# Altium PCB PCB1.PcbDoc
Units mil, origin at the board's own origin, x right, y up, seen from the top; angles counter-clockwise.
Board outline 1444.03 x 1769.03 mil, 2 copper layers (Top Layer, Bottom Layer); 51 components, 74 nets, 285 pads, 210 vias.
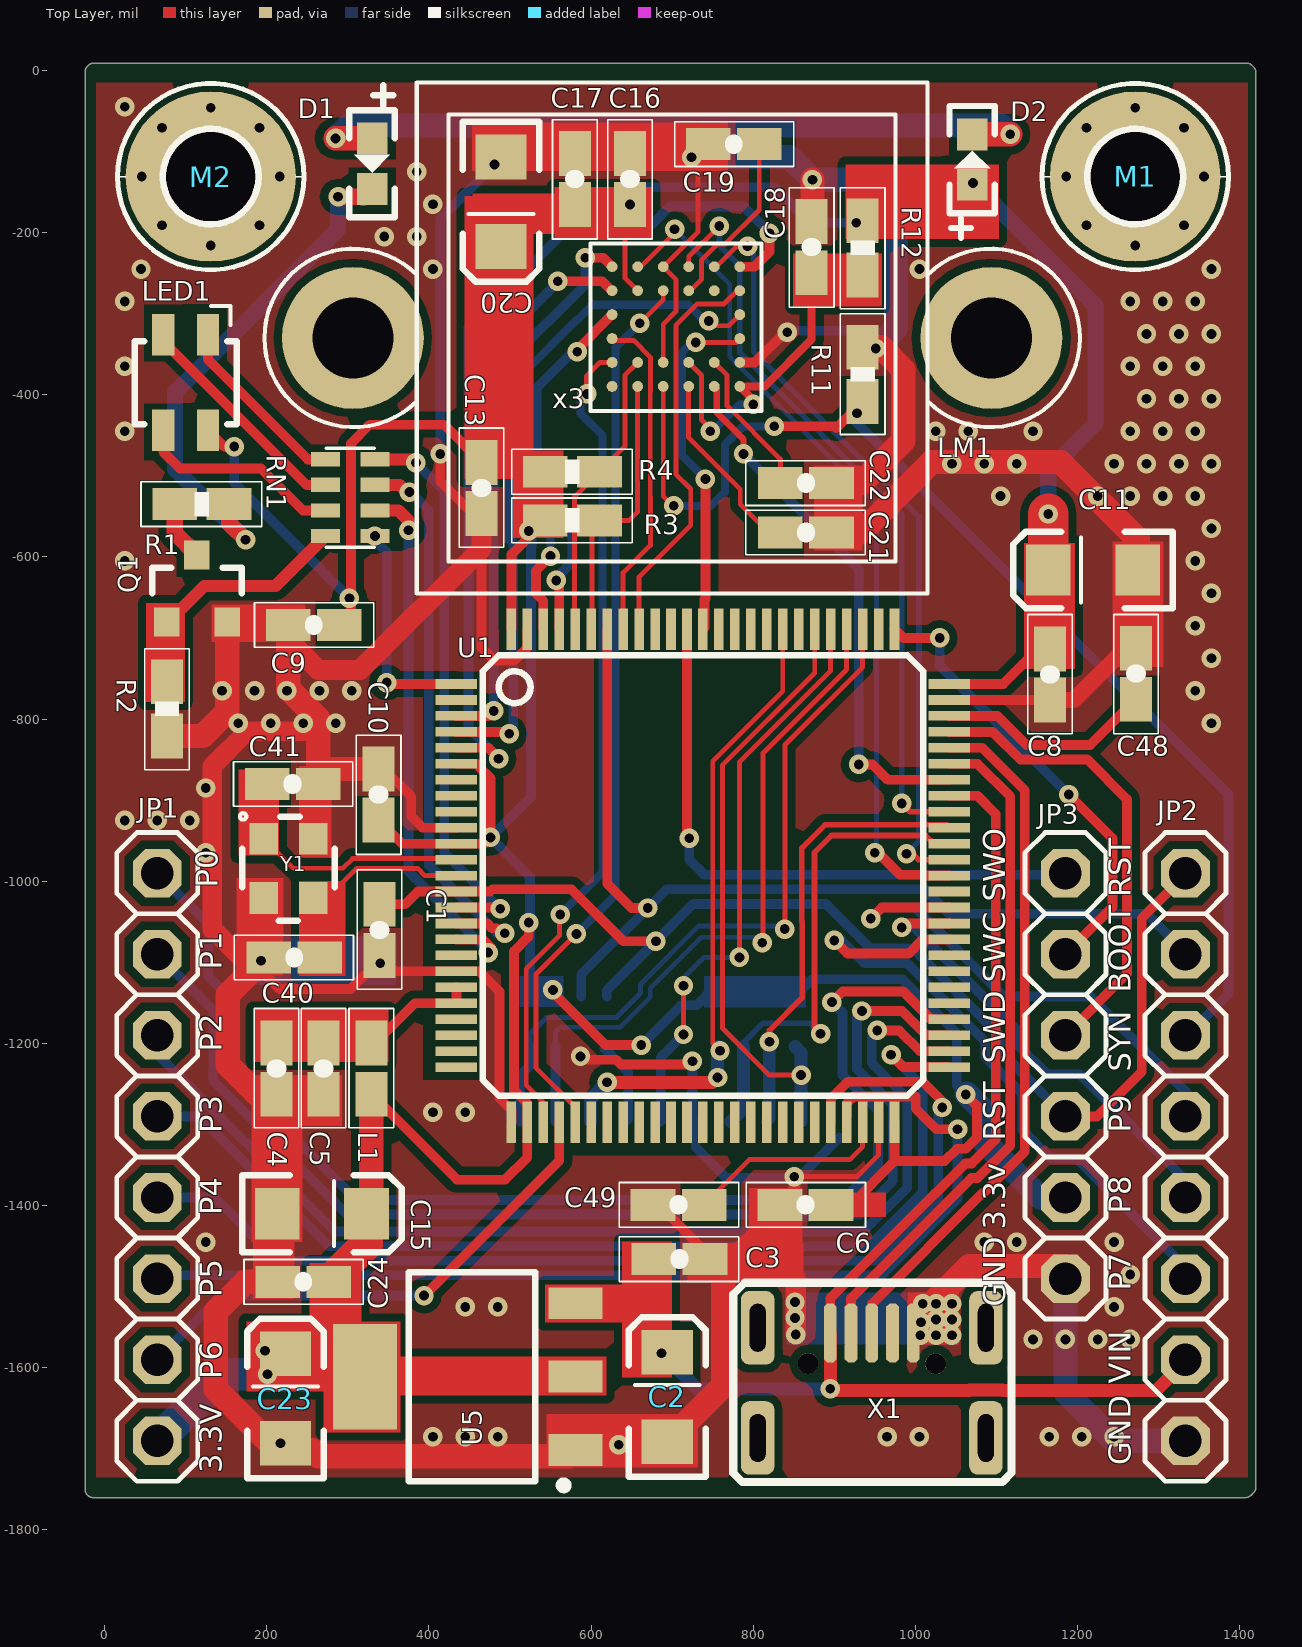
[diagram p0: Top Layer view]
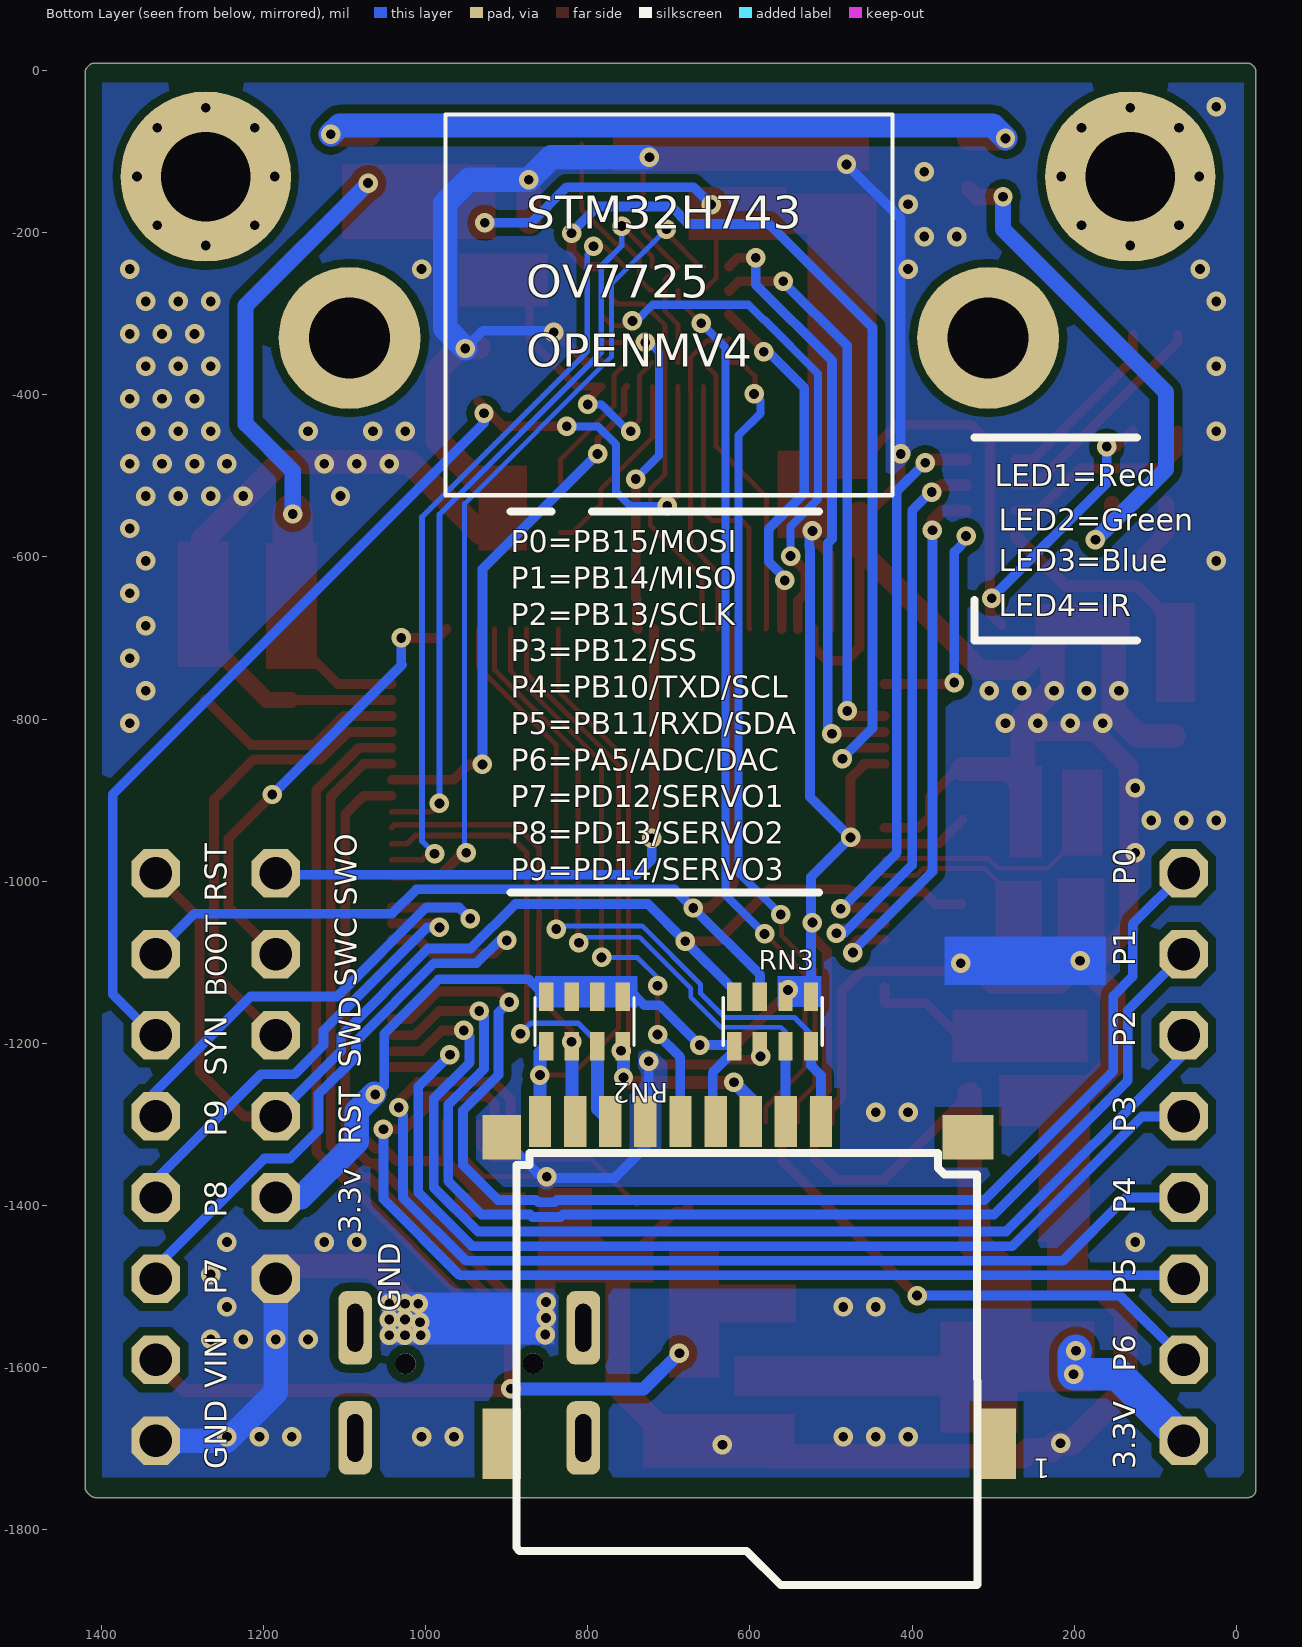
[diagram p1: Bottom Layer view, seen from below]

## Layer stack, top to bottom
Top Solder: solder mask 0.4, Solder Resist, Dk 3.5
Top Layer: signal copper 1.4
Dielectric 1: dielectric 12.6, FR-4, Dk 4.8
Bottom Layer: signal copper 1.4
Bottom Solder: solder mask 0.4, Solder Resist, Dk 3.5

## Board outline
-24.01,-1750 -24.01,-2 cw(c-14,-2) -21.08,5.08 -20.08,6.08 cw(c-13,-1) -13,9.01 1408,9.01 cw(c1408,-1) 1415.08,6.08 1417.08,4.08 cw(c1410,-3) 1420.01,-3 1420.01,-1747 cw(c1410,-1747) 1417.08,-1754.08 1414.08,-1757.08 cw(c1407,-1750) 1407,-1760.01 -14,-1760.01 cw(c-14,-1750)

## Design rules (kind name [scope] priority, off if disabled: settings)
Clearance [All] p1: gap=10 ignorepadtopadclearanceinfootprint=FALSE except(0: Arc-Hole Track-Hole SMDPad-Hole THPad-Hole Via-Hole Fill-Hole Poly-Hole Region-Hole Text-Hole; 6: Arc-Arc Arc-Track Arc-SMDPad Arc-THPad Arc-Via Track-Track Track-SMDPad Track-THPad Track-Via SMDPad-SMDPad SMDPad-THPad SMDPad-Via THPad-THPad THPad-Via Via-Via)
DiffPairsRouting [All] p1: maxlimit=10 minlimit=8 mostfreqgap=10 toplayer_minwidth=15 toplayer_maxwidth=1000 toplayer_prefwidth=15 bottomlayer_minwidth=15 bottomlayer_maxwidth=1000 bottomlayer_prefwidth=15 maxuncoupledlength=500
PlaneConnect [All] p1: planeconnectstyle=Direct reliefexpansion=20 reliefentries=4 reliefconductorwidth=10 reliefairgap=10
PolygonConnect [All] p1: connectstyle=Direct reliefconductorwidth=10 reliefentries=4 polygonreliefangle="90 Angle" airgapwidth=10
RoutingVias [All] p1: holewidth=12 width=32 viastyle="Through Hole" minholewidth=12 minwidth=24 maxholewidth=28 maxwidth=50
SolderMaskExpansion [All] p1: expansion=4
Width [All] p1: maxlimit=99999 minlimit=6 preferedwidth=6
28 further rules are at their usual default settings.

## Components (designator, comment, footprint, x,y, rotation, side; value= is the part's Value field where it differs from the comment)
1 "TF-SD" TF 601,-1495 r270 bottom
C1 "1uF" 0603-CAP 339,-1060 r270 top
C2 "47uF" EIA3216 694,-1636 r90 top
C3 "Cap" 0603-CAP 709,-1466 r0 top value=104
C4 "1uF" 0603-CAP 212,-1231 r270 top
C5 "0.1uF" 0603-CAP 270,-1231 r270 top
C6 "0.1uF" 0603-CAP 864.5,-1399 r180 top
C8 "0.1uF" 0603-CAP 1166,-745 r270 top
C9 "0.1uF" 0603-CAP 258,-684 r180 top
C10 "0.1uF" 0603-CAP 338,-893 r90 top
C11 "47uF" EIA3216 1219,-616 r180 top
C13 "0.1uF" 0603-CAP 465,-515 r270 top
C15 "47uF" EIA3216 268,-1410 r0 top
C16 "0.1uF" 0603-CAP 648,-134 r90 top
C17 "22uF" 0603-CAP 580,-134 r90 top
C18 "4.7uF" 0603-CAP 872,-218 r90 top
C19 "0.1uF" 0603-CAP 776,-91 r180 top
C20 "47uF" EIA3216 489,-162 r270 top
C21 "0.1uF" 0603-CAP 865,-570 r0 top
C22 "0.1uF" 0603-CAP 865,-509 r0 top
C23 "47uF" EIA3216 223,-1638 r90 top
C24 "Cap" 0603-CAP 245,-1494 r180 top value=104
C40 "12pF" 0603-CAP 234,-1094 r0 top
C41 "12pF" 0603-CAP 232,-880 r180 top
C48 "2.2uF" 0603-CAP 1272,-744 r90 top
C49 "2.2uF" 0603-CAP 708,-1399 r180 top
D1 "LED0" LED_0603 330,-115 r270 top
D2 "LED0" LED_0603 1070,-110 r90 top
JP1 "PINHD-1X8" 1X08 65,-1340 r270 top
JP2 "PINHD-1X8" 1X08 1333,-1340 r270 top
JP3 "PINHD-1X6" 1X06 1185,-1240 r270 top
L1 "MPZ1608S181ATAH0" 0603 329,-1231 r270 top
LED1 "LED-TRICOLOR" RGB 100,-385 r0 top
LM1 "LENSMOUNT20MM" LENSMOUNT-20MM 700,-330 r180 top locked
M1 "9774030243R" 2,8-PAD 1271,-131 r90 top
M2 "9774030243R" 2,8-PAD 131,-131 r90 top
Q1 "BSS138" SOT23-3 114,-641 r0 top
R1 "10R" 0603-RES 120,-535 r0 top
R2 "10K" 0603-RES 77,-787.46 r90 top
R3 "4.7K" 0603-RES 577,-555 r0 top
R4 "4.7K" 0603-RES 577,-495 r0 top
R11 "10k" 0603-RES 935,-375 r270 top
R12 "4.7R" 0603-RES 935,-219 r90 top
RN1 "220R" EXBV8V 303,-527 r270 top
RN2 "10K" EXBV8V 804,-1173 r0 bottom
RN3 "10K" EXBV8V 572,-1173 r0 bottom
U1 "STM32H743VIT6" LQFP100 738,-993 r0 top
U5 "AMS1117 3.3" SOT_223 453,-1611 r90 top
X1 "MF-CON-MICROUSB-RIGHT" MICRO_USB 946.26,-1731.81 r0 top
x3 "OV7725" CSP2-28 704.72,-316.93 r180 top
Y1 "7S-12.000MAHE-T" CRYSTAL-2.5X2.0 228,-985 r270 top

## Footprints (in the part's own frame and the unit in brackets; to place one, negate y for a bottom-side part, rotate by r counter-clockwise, add the part's x,y. Pads: shape width x height; smd on the part's side, far side on the other; paste and mask are expansions set on the pad)
1X06 [mil] "1X06"
  oct 60x60 hole 40: 1(-250,0) 2(-150,0) 3(-50,0) 4(50,0) 5(150,0) 6(250,0)
  silkscreen extent -300,-50 300,50
1X08 [mil] "1X08"
  oct 60x60 hole 40: 1(-350,0) 2(-250,0) 3(-150,0) 4(-50,0) 5(50,0) 6(150,0) 7(250,0) 8(350,0)
  silkscreen extent -400,-50 400,50
2,8-PAD [mil] "2,8-PAD"
  round 210 hole 110.24: B2,8(0,0)
  silkscreen extent -115,-115 115,115
0603 [mm] "0603"
  rect 1.4x1 smd: 1(-0.8,0) 2(0.8,0)
  silkscreen extent -1.88,-0.7 1.85,0.7
0603-CAP [mm] "0603-CAP"
  rect 1.4x1 smd: 1(-0.8,0) 2(0.8,0)
  silkscreen extent -1.88,-0.7 1.85,0.7
0603-RES [mm] "0603-RES"
  rect 1.4x1 smd: 1(-0.85,0) 2(0.85,0)
  silkscreen extent -1.91,-0.7 1.88,0.7
CRYSTAL-2.5X2.0 [mm] "CRYSTAL-2.5X2.0"
  rect 1x0.9 smd: 1(-0.95,-0.8) 2(0.9,-0.8) 3(0.9,0.75) 4(-0.95,0.75)
  silkscreen extent -1.75,-1.55 1.61,1.42
CSP2-28 [mm] "CSP2-28"
  rrect100% 0.34x0.34 smd: A1(-2,1.85) A2(-1.2,1.85) A3(-0.4,1.85) A4(0.4,1.85) A5(1.2,1.85) A6(2,1.85) B1(-2,1.1) B2(-1.2,1.1) B3(-0.4,1.1) B4(0.4,1.1) B5(1.2,1.1) B6(2,1.1) C1(-2,0.35) C6(2,0.35) D1(-2,-0.4) D6(2,-0.4) E1(-2,-1.15) E2(-1.2,-1.15) E3(-0.4,-1.15) E4(0.4,-1.15) E5(1.2,-1.15) E6(2,-1.15) F1(-2,-1.9) F2(-1.2,-1.9) F3(-0.4,-1.9) F4(0.4,-1.9) F5(1.2,-1.9) F6(2,-1.9)
  silkscreen extent -2.68,-2.63 2.68,2.63
EIA3216 [mil] "EIA3216"
  rect 55.12x62.99 smd: A(55.12,0) C(-55.12,0)
  silkscreen extent -98,-47 98,47
EXBV8V [mm] "EXBV8V"
  rect 0.45x0.9 smd: 1(-1.2,-0.775) 2(-0.4,-0.775) 3(0.4,-0.775) 4(1.2,-0.775) 5(1.2,0.775) 6(0.4,0.775) 7(-0.4,0.775) 8(-1.2,0.775)
  silkscreen extent -1.55,-0.75 1.55,0.75
LED_0603 [mm]
  rect 1x0.96 smd: 1(-0.79,0) 2(0.79,0)
  silkscreen extent -2.45,-0.71 1.68,0.71
LENSMOUNT-20MM [mil] "LENSMOUNT-20MM"
  round 175 hole 100: P$1(-393.7,0) P$2(393.7,0)
  silkscreen extent -503,-315 503,315
LQFP100 [mm] "LQFP100"
  rect 1.3x0.3 smd: 1(-7.72,6) 2(-7.72,5.5) 3(-7.72,5) 4(-7.72,4.5) 5(-7.72,4) 6(-7.72,3.5) 7(-7.72,3) 8(-7.72,2.5) 9(-7.72,2) 10(-7.72,1.5) 11(-7.72,1) 12(-7.72,0.5) 13(-7.72,0) 14(-7.72,-0.5) 15(-7.72,-1) 16(-7.72,-1.5) 17(-7.72,-2) 18(-7.72,-2.5) 19(-7.72,-3) 20(-7.72,-3.5) 21(-7.72,-4) 22(-7.72,-4.5) 23(-7.72,-5) 24(-7.72,-5.5) 25(-7.72,-6) 51(7.72,-6) 52(7.72,-5.5) 53(7.72,-5) 54(7.72,-4.5) 55(7.72,-4) 56(7.72,-3.5) 57(7.72,-3) 58(7.72,-2.5) 59(7.72,-2) 60(7.72,-1.5) 61(7.72,-1) 62(7.72,-0.5) 63(7.72,0) 64(7.72,0.5) 65(7.72,1) 66(7.72,1.5) 67(7.72,2) 68(7.72,2.5) 69(7.72,3) 70(7.72,3.5) 71(7.72,4) 72(7.72,4.5) 73(7.72,5) 74(7.72,5.5) 75(7.72,6)
  rect 0.3x1.3 smd: 26(-6,-7.72) 27(-5.5,-7.72) 28(-5,-7.72) 29(-4.5,-7.72) 30(-4,-7.72) 31(-3.5,-7.72) 32(-3,-7.72) 33(-2.5,-7.72) 34(-2,-7.72) 35(-1.5,-7.72) 36(-1,-7.72) 37(-0.5,-7.72) 38(0,-7.72) 39(0.5,-7.72) 40(1,-7.72) 41(1.5,-7.72) 42(2,-7.72) 43(2.5,-7.72) 44(3,-7.72) 45(3.5,-7.72) 46(4,-7.72) 47(4.5,-7.72) 48(5,-7.72) 49(5.5,-7.72) 50(6,-7.72) 76(6,7.72) 77(5.5,7.72) 78(5,7.72) 79(4.5,7.72) 80(4,7.72) 81(3.5,7.72) 82(3,7.72) 83(2.5,7.72) 84(2,7.72) 85(1.5,7.72) 86(1,7.72) 87(0.5,7.72) 88(0,7.72) 89(-0.5,7.72) 90(-1,7.72) 91(-1.5,7.72) 92(-2,7.72) 93(-2.5,7.72) 94(-3,7.72) 95(-3.5,7.72) 96(-4,7.72) 97(-4.5,7.72) 98(-5,7.72) 99(-5.5,7.72) 100(-6,7.72)
  silkscreen extent -6.9,-6.9 6.9,6.9
MICRO_USB [mm]
  rrect50% 1.05x2.3 hole 0.5 slot 1.5 at 90 deg: 0(-3.575,1.15) 0(-3.575,4.6) 0(3.575,1.15) 0(3.575,4.6)
  round 0.65 hole 0.65 unplated: 0(-2,3.475) 0(2,3.475)
  oct 0.4x1.85 smd: 1(-1.3,4.434) 2(-0.65,4.434) 3(0,4.434) 4(0.65,4.434) 5(1.3,4.434)
  silkscreen extent -4.34,-0.23 4.38,6.01
RGB [mm] "LED-TRICOLOR-SMD-MF"
  rect 0.7x1.3 smd: A(0.7,-1.5) B(-0.7,-1.5) G(-0.7,1.5) R(0.7,1.5)
  silkscreen extent -1.6,-1.3 1.6,2.4
SOT23-3 [mil] "SOT23-3"
  rect 31.5x35.43 smd: 1(-37.4,-39.37) 2(37.4,-39.37) 3(0,43.31)
  silkscreen extent -55,-4 55,28
SOT_223 [mm]
  rect 1x1.7 smd: 1(-2.3,-3.25) 2(0,-3.25) 3(2.3,-3.25)
  rect 3.3x2 smd: 2(0,3.349)
  silkscreen extent -3.53,-3 3.28,1.98, body extent -3.25,-3.51 3.25,3.51, height 1.93
TF [mm]
  rect 1.4x1.6 smd: 0(-4.55,6.85)
  rect 1.6x0.7 smd: 1(-5.05,2.25) 2(-5.05,1.15) 3(-5.05,0.05) 4(-5.05,-1.05) 5(-5.05,-2.15) 6(-5.05,-3.25) 7(-5.05,-4.35) 8(-5.05,-5.45) 9(-5.05,-6.55)
  rect 1.4x1.2 smd: 10(-4.55,-7.75)
  rect 2.2x1.2 smd: 11(5.05,-7.75) 12(5.05,7.75)
  silkscreen extent -4.06,-7.29 9.47,7.15

## Part data
C1 C4 C5 C6 C8 C9 C10 C13 C16 C18 C19 C21 C22 C40 C41 C48 C49: library part CAP0603-CAP, "CapacitorStandard 0603 ceramic capacitor, and 0.1\" leaded capacitor."
C2 C11 C15 C20 C23: library part CAP_POL1206, "Capacitor PolarizedThese are standard SMD and PTH capacitors. Normally 10uF, 47uF, and 100uF in electrolytic and tantalum varieties. Always verify the external diameter of the through hole cap, it varies with capacity, voltage, and manufacturer. The EIA devices should be standard."
C3 C24: "Capacitor", LatestRevisionDate=17-Jul-2002, LatestRevisionNote="Re-released for DXP Platform.", PackageDescription="Radial Cap, Thru-Hole; 2 Leads; 0.3 in Pin Spacing", PackageReference=RAD-0.3, Published=8-Jun-2000, Publisher="Altium Limited"
C17: library part CAP0805, "CapacitorStandard 0603 ceramic capacitor, and 0.1\" leaded capacitor."
D1 D2: "Typical INFRARED GaAs LED", LatestRevisionDate=08-Jul-2005, LatestRevisionNote="Mech Layer 1 removed.", PackageDescription="LED; 2 Leads", PackageReference=LED-0, Published=8-Jun-2000, Publisher="Altium Limited"
JP1 JP2 JP3: "PIN HEADER"
L1: library part INDUCTOR0603, "InductorsBasic Inductor/Choke - 0603 and 1206. Footprints are not proven and vary greatly between part numbers."
LED1: "Tri-Color LED SMDProven layout and schematic for triple color LED in SMD package - common anode. Spark Fun Electronics SKU : COM-07844"
M1 M2: library part 9774030151R
Q1: library part MOSFET-NCHANNELSMD
R1 R2 R3 R4 R11 R12: library part RESISTOR0603-RES, "ResistorBasic schematic elements and footprints for 0603, 1206, and PTH resistors."
RN1 RN2 RN3: library part 4R-NEXBV8V, "Array Chip Resistor   Source: RS Component / Phycomp", OC_FARNELL=unknown, OC_NEWARK=unknown
U1: library part STM32F746LQFP100
U5: library part AMS1117
X1: library part USB_MICRO_RIGHT, "Library:  MF_Connectors Description: 5 Pin USB Connectors. SLD is the shield connection. Usually tied to ground through a small ferrite bead.", 5V=5V, D+=D+, D-=D-, GND=GND, ID=ID, SHIELD=SHIELD, USBPORT="USB PORT"
Y1: library part CRYSTAL2.5X2.0, "CrystalsVarious standard crystals. Proven footprints. Spark Fun Electronics SKU : COM-00534", 1=1, 2=2

## Via types
v1: diameter 24, hole 12, Top Layer to Bottom Layer, tented both sides, 124 vias
v2: diameter 24, hole 12, Top Layer to Bottom Layer, 86 vias

## Nets (pads, with @x,y where several pads share a name; then routed paths per layer and width w, separated by ;. In a path a pad name is that pad's centre, name@x,y a point inside that pad or via, vN(x,y) a via of type N, cw(c..) or ccw(c..) an arc to the next point about the centre after c; other vN are vias at no path point)
AVDD: C18.1 R12.1 x3.A1 x3.B3 | length 386.5
  Top Layer w6: x3.B3 736.16,-375.93 736.16,-430.84 747,-441.67 v1(747,-445)
  Top Layer w10: v1(800,-412) 800,-406.3 x3.A1 814.24,-389.76 872,-332 C18.1
  Bottom Layer w10: v1(747,-445) 750,-445 783,-412 v1(800,-412)
BOOT0: JP2.2 RN3.3 U1.94 | length 1229.6
  Top Layer w12: U1.94 619.89,-1002.89 650,-1033 v1(670,-1033) ; JP2.2 JP2.2@1335,-1090
  Bottom Layer w12: RN3.3 587.75,-1115.25 v1(670,-1033) 693,-1010 1011.46,-1010 1041.46,-1040 1285,-1040 JP2.2@1335,-1090
DAC: JP1.7 U1.29 | length 645.3
  Top Layer w12: v1@394,-1511.46 560.83,-1344.63 U1.29
  Bottom Layer w12: JP1.7 144,-1511 v1(394,-1511)
DCMI_CLK: U1.67 x3.F3 | length 934
  Top Layer w6: x3.F3 720.47,-229.56 v1(758,-192.03)
  Top Layer w7: v1(983,-904) 993.26,-914.26 U1.67
  Bottom Layer w7: v1(758,-192.03) 758,-216.12 783.5,-241.62 783.5,-348.12 983,-547.62 v1(983,-904)
DCMI_D0: U1.63 x3.F5 | length 1042.5
  Top Layer w6: x3.F5 661.25,-242.13 703,-200.38 v1(703,-196)
  Top Layer w12: v1@952,-963 981,-992 1010.46,-992 1011.46,-993 U1.63
  Bottom Layer w6: v1(703,-196) 771,-264 771,-353.3 952,-534.3 952,-963 v1(950,-965)
DCMI_D1: U1.64 x3.F2 | length 932.8
  Top Layer w6: x3.F2 754.57,-242.13 779.7,-217 v1@789,-217
  Top Layer w7: v1(989,-966) 996.38,-966 1003.69,-973.31 U1.64
  Bottom Layer w7: 800.5,-227.5 800.5,-346.74 1004.5,-550.74 1004.5,-950.5 v1(989,-966)
  other v1: 793,-217
DCMI_D2: U1.97 x3.D6 | length 461.6
  Top Layer w12: v1(557,-629) 560.83,-632.83 U1.97 ; v1(583,-347) 583,-344.16 x3.D6
  Bottom Layer w12: v1(557,-629) 557,-628.83 557.83,-628 559.91,-630.09 562,-628 562,-620.94 577,-605.94 577,-565.43 533,-521.43 533,-392 578,-347 v1(583,-347)
DCMI_D3: U1.98 x3.D1 | length 669.5
  Top Layer w6: v1(745,-309) 745,-314 746.01,-315.01 769.62,-315.01 x3.D1
  Top Layer w12: U1.98 541.15,-654.28 532,-645.13 532,-617 v1(550,-599)
  Bottom Layer w10: v1(550,-599) 550,-562.47 516,-528.47 516,-374.13 582.13,-308 582.98,-308 601.98,-289 720,-289 745,-314 v1(745,-309)
DCMI_D4: U1.3 x3.E6 | length 683.3
  Top Layer w12: U1.3 473.85,-796.15 v1(480,-790) ; v1(559,-260) 613.63,-260 625.63,-272 x3.E6
  Bottom Layer w12: v1(480,-790) 480,-340 559,-261 v1(559,-260)
DCMI_D5: U1.92 x3.E1 | length 509.6
  Top Layer w6: U1.92 659.26,-624.74 723,-561 723,-516.3 704.66,-497.97 704.66,-314.34 731,-288 764,-288 783.46,-268.54 x3.E1
DCMI_D6: U1.4 x3.F6 | length 733.5
  Top Layer w12: U1.4 496.83,-815.83 v1(499,-818) ; v1(593,-231) 614.85,-231 x3.F6
  Bottom Layer w12: v1(499,-818) 504,-813 504,-582.94 499,-577.94 499,-358 593,-264 v1(593,-231)
DCMI_D7: U1.5 x3.F1 | length 1119.4
  Top Layer w12: U1.5 473.52,-835.52 486,-848 v1(486,-849) ; x3.F1 801.87,-242.13 820,-224 v1(820,-201)
  Bottom Layer w12: v1(486,-849) 486,-848 449,-811 449,-317 576.5,-189.5 675.56,-189.5 697.03,-168.03 788.03,-168.03 820,-200 v1(820,-201)
DCMI_FSIN: JP2.3 R11.2 x3.A4 | length 1453.2
  Top Layer w6: x3.A4 689,-525 701,-537 v1(702,-537)
  Top Layer w12: v1(826,-439) 900.46,-439 902.46,-441 R11.2
  Bottom Layer w10: v1(702,-537) 748,-537 765,-520 765,-461.47 787.47,-439 v1(826,-439)
  Bottom Layer w12: v1(928,-423) 928,-435 1386,-893 1386,-1139 JP2.3@1335,-1190
DCMI_HSYNC: U1.28 x3.B6 | length 1021.1
  Top Layer w6: U1.28 541.15,-1272.63 520,-1251.48 520,-1108 561,-1067 561,-1042 v1(562,-1041) ; v1@594,-399 594,-377 610.76,-360.24 x3.B6
  Bottom Layer w10: v1(562,-1041) 614,-989 614,-450 587,-423 587,-407 v1(595,-399)
DCMI_PCLK: U1.30 x3.E4 | length 1110.4
  Top Layer w6: U1.30 580.52,-1278.41 532,-1229.89 532,-1115 v1(582,-1065) ; v1(660,-312) 688.97,-283.03 x3.E4
  Bottom Layer w10: v1(582,-1065) 630,-1017 630,-342 v1(660,-312)
DCMI_PWDN: U1.88 x3.C1 | length 437.2
  Top Layer w6: v1@727.57,-339 729.12,-337.45 v1(729.12,-335.55) 778.62,-335.55 x3.C1
  Top Layer w12: U1.88 739.78,-687.28 739.78,-652.5 741,-651.28 v1(741,-504)
  Bottom Layer w10: v1(729.12,-335.55) 724.12,-335.55 712,-347.66 712,-475 v1(741,-504)
DCMI_RST: U1.69 x3.A2 | length 659.8
  Top Layer w8: x3.A2 754.76,-392.57 754.76,-421.65 788,-454.89 v1(788,-473)
  Top Layer w12: v1(930,-856) 947,-856 965.89,-874.89 U1.69
  Bottom Layer w12: v1(788,-473) 930,-615 v1(930,-856)
DCMI_VSYNC: U1.93 x3.C6 | length 406.1
  Top Layer w6: x3.C6 628.27,-333 652.44,-333 673.18,-353.74 673.18,-396.26 673,-396.44 673,-525.97 673.18,-526.15 673.18,-585.85 639.57,-619.46 U1.93
EXPST: U1.55
FREX: U1.56
FS_DM: U1.70 X1.2 | length 839.4
  Top Layer w12: X1.2 920.67,-1514.33 1069,-1366 1076.85,-1366 1117,-1325.85 1117,-895.48 1076.72,-855.2 U1.70
FS_DP: U1.71 X1.3 | length 862.8
  Top Layer w12: X1.3 946.26,-1521.11 1083.37,-1384 1084.31,-1384 1135,-1333.31 1135,-888.03 1082.49,-835.52 U1.71
GND: 1.6 1.10 C1.2 C2.C C3.2 C4.2 C5.2 C6.2 C8.2 C9.2 C10.2 C11.C C13.2 C15.C C16.2 C17.2 C18.2 C19.2 C20.C C21.2 C22.2 C23.C C24.2 C40.1 C41.1 C48.2 C49.2 JP2.8 JP3.6 Q1.2 R2.1 R11.1 RN3.6 U1.10 U1.19 U1.26 U1.49 U1.74 U1.99 U5.1 X1.5 x3.B1 x3.B4 x3.F4 Y1.2 Y1.4 | length 7860.6
  Top Layer w6: x3.B4 688.97,-313.06 704.66,-297.36 704.66,-257.82 x3.F4 732,-199.1 732,-115 v1(724,-107) ; v1(850.68,-1364.32) 927.68,-1364.32 954.54,-1337.46 U1.49
  Top Layer w8: U1.74 U1.74@1041.98,-776.5
  Top Layer w12: C40.1@192,-1104.5 C40.1 ; C40.1@192,-1100 192,-1109 216,-1133 303.63,-1133 339,-1097.63 C1.2 358.61,-1111.11 U1.19 462.17,-1111.11 487,-1135.94 487,-1267.22 501.78,-1282 U1.26 ; C10.2 344.07,-861.5 378.28,-895.72 378.28,-920.28 391.94,-933.94 U1.10 ; v1(414,-473) 414,-506.63 453.87,-546.5 C13.2 ; 465,-589.78 465,-712 481,-728 505.31,-728 521.46,-711.85 U1.99 ; v1(587,-1216) 591,-1220 631,-1220 637,-1226 721,-1226 v1(725,-1222) ; C49.2 676.5,-1407.5 691.66,-1407.5 740.5,-1456.34 C3.2 ; C3.2@766,-1466 C6.2 C6.2@850.68,-1381.32 ; x3.B1 801.76,-360.24 839,-323 v1(842,-323) ; U1.74@1041.98,-776.5 C8.2
  Top Layer w15: C6.2@833,-1412 850.68,-1394.32 850.68,-1381.32 v1(850.68,-1364.32) ; X1.5 997.44,-1517
  Top Layer w20: C8.2 1195.5,-776.5 1259.5,-712.5 C48.2
  Top Layer w24: C40.1 168,-1094 133,-1059 133,-858 176,-815 263.5,-815
  Top Layer w25: C9.2 226.5,-702.37 263.57,-739.43 315.35,-739.43 465,-589.78 C13.2@465,-563 ; 827,-1465 852.5,-1490.5 v1(852.5,-1559)
  Top Layer w30: R2.1 121.08,-820.92 151.4,-790.6 Q1.2 ; C40.1@192,-1100 152,-1140 152,-1226.36 188.14,-1262.5 C4.2 ; C15.C 213.5,-1410.62 C24.2 174,-1494 137,-1531 137,-1626.36 203.64,-1693 v1(217,-1693) ; C23.C 223,-1696 228.55,-1701.55 256.2,-1701.55 263.64,-1709 573.5,-1709 U5.1 ; C9.2@226.5,-702.37 226.5,-762.5 263.5,-799.5 263.5,-815 C41.1 ; Y1.4 257.53,-885.97 C41.1 ; C10.2 282,-861.5 C41.1 ; C13.2@465,-563 C13.2 ; C20.C 493.38,-102.5 C17.2 C16.2 659.5,-91 C19.2@726.04,-91 ; C2.C 763,-1622.12 763,-1469 C3.2@766,-1466 ; v1(724,-107) C19.2@726.04,-91 ; C18.2 873,-185.5 v1(873,-135) ; C21.2 933,-570 1020,-483 1178.96,-483 1274.12,-578.16 C11.C ; C22.2 933,-509 985.2,-456.8 985.2,-369 957.74,-341.54 R11.1 ; v1@1017,-1555 1017,-1524 1066.57,-1474.43 1185,-1474.43 JP3.6 ; C19.2@726.04,-91 C19.2 732,-78.5 727,-83.5 726.34,-88.68 C19.2@726.04,-91
  Bottom Layer w12: v1(414,-473) 414,-183 v1(481,-116) ; v1(725,-1222) 725,-1292.23 1.6 728.95,-1327.95 767,-1366 849,-1366 v1(850.68,-1364.32) 854.33,-1364.32 856,-1365.98 1.10 ; v1(842,-323) 842,-326 847,-321 929,-321 v1(951,-343)
  Bottom Layer w30: v1@727,-107 845,-107 v1(873,-135) 947,-135 976,-164 976,-318 v1(951,-343) ; JP3.6 1185,-1630 1245,-1690 JP2.8@1335,-1690
  other v1: 634,-1695 1006,-1560 1025.5,-1560 1045,-1560 1007,-1544 1025.5,-1540.5 1045,-1540.5 851.5,-1538.5 1009,-1521 1025.5,-1521 1045,-1521 851.5,-1519 340,-1101 193,-1098
  other v2: 405,-1685 445,-1685 485,-1685 965,-1685 1005,-1685 1165,-1685 1205,-1685 1245,-1685 1145,-1565 1185,-1565 1225,-1565 1265,-1565 445,-1525 485,-1525 1245,-1525 1265,-1485 125,-1445 1085,-1445 1125,-1445 1245,-1445 405,-1285 445,-1285 125,-965 25,-925 65,-925 105,-925 125,-885 165,-805 205,-805 245,-805 285,-805 1365,-805 145,-765 185,-765 225,-765 265,-765 305,-765 1345,-765 1365,-725 1345,-685 1365,-645 25,-605 1345,-605 1365,-565 1105,-525 1225,-525 1265,-525 1305,-525 1345,-525 1045,-485 1085,-485 1125,-485 1245,-485 1285,-485 1325,-485 1365,-485 25,-445 1025,-445 1065,-445 1145,-445 1265,-445 1305,-445 1345,-445 1285,-405 1325,-405 1365,-405 25,-365 1265,-365 1305,-365 1345,-365 1285,-325 1325,-325 1365,-325 25,-285 1265,-285 1305,-285 1345,-285 45,-245 405,-245 1005,-245 1365,-245 345,-205 385,-205 405,-165 385,-125 25,-45
GPIO1: U1.84
GPIO2: U1.85
GPIO3: U1.82
I2C1_SCL: R3.2 U1.95 x3.A5 | length 344.4
  Top Layer w6: U1.95 601,-688.26 601,-564.46 R3.2 647,-555 657.48,-544.52 x3.A5
I2C1_SDA: R4.2 U1.96 x3.B5 | length 361.3
  Top Layer w6: U1.96 579.81,-688.35 579.81,-525.65 R4.2 641.78,-463.68 641.78,-375.93 x3.B5
I2C2_SCL: JP1.5 U1.46 | length 1345.3
  Top Layer w12: U1.46 895.48,-1268.39 916.52,-1247.35 1009.35,-1247.35 1038,-1276 1035,-1279 v1(1033,-1279)
  Bottom Layer w12: JP1.5 136.18,-1390 214.18,-1468 950.46,-1468 1028,-1390.46 1028,-1288.54 1037.54,-1279 v1(1033,-1279)
I2C2_SDA: JP1.6 U1.47 | length 1294.5
  Top Layer w12: U1.47@915.17,-1289 915.17,-1274.15 923.97,-1265.35 1000.35,-1265.35 1000.35,-1280.29 1026.06,-1306 v1(1052,-1306)
  Bottom Layer w12: JP1.6 69,-1486 957.91,-1486 1052,-1391.91 v1(1052,-1306)
LED_B: RN1.6 U1.17 | length 678
  Top Layer w12: U1.17 434.32,-1072 466.6,-1072 475.1,-1080.5 v1@475.5,-1080.5 ; v1(473,-1088) 473,-1086 474,-1085 477,-1082 v1@475.5,-1080.5 ; v1@475.5,-1083.5 v1@475.5,-1080.5
  Top Layer w15: RN1.6 362.69,-542.75 375,-555.06 v1(375,-567)
  Bottom Layer w12: v1(375,-567) 375,-988 473,-1086 v1(473,-1088)
LED_G: RN1.7 U1.16 | length 709.2
  Top Layer w12: U1.16 472.12,-1052.06 478.06,-1058 484,-1058 485,-1059 490,-1064 v1(493.43,-1064)
  Top Layer w15: RN1.7 364.02,-511.25 372.77,-520 v1(376,-520)
  Bottom Layer w12: v1(376,-520) 377.11,-520 400,-542.89 400,-979.94 484.06,-1064 v1(493.43,-1064)
LED_IR: RN1.5 U1.1 | length 275.6
  Top Layer w12: v1(348,-755) 349.78,-756.78 U1.1
  Bottom Layer w12: v1(333.51,-574.24) 331,-576.75 348,-593.75 v1(348,-755)
LED_R: RN1.8 U1.15 | length 699.9
  Top Layer w12: U1.15 486.37,-1032.37 v1(488,-1034)
  Top Layer w15: RN1.8 376.76,-479.76 381,-484 v1(384,-484)
  Bottom Layer w12: v1(384,-484) 419,-519 419,-965 v1(488,-1034)
NetC4_1: C4.1 C5.1 L1.1 U1.20 U1.21 | length 145
  Top Layer w12: L1.1 333.5,-1199.5 382.52,-1150.48 U1.21 U1.20
NetC19_1: C19.1 x3.E3 | length 223.5
  Top Layer w6: x3.E3 722.34,-271.65 736.26,-257.72 736.26,-233.74 756,-214 765.73,-214 807.5,-172.23 C19.1
NetC21_1: C21.1 x3.A3 | length 235.9
  Top Layer w6: x3.A3 720,-390.23 720,-452.7 784,-516.7 784,-535 819,-570 C21.1
NetC22_1: C22.1 x3.B2 | length 182.5
  Top Layer w6: x3.B2 767.76,-376.05 767.76,-413.76 833.5,-479.5 C22.1
NetC40_2: C40.2 U1.13 Y1.3 | length 195.3
  Top Layer w6: Y1.3 274.54,-1020.43 310.9,-984.07 386.07,-984.07 395,-993 U1.13
NetC41_2: C41.2 U1.12 Y1.1 | length 258.1
  Top Layer w6: Y1.1 232.9,-984 294,-984 305.93,-972.07 432.82,-972.07 U1.12
NetD1_1: D1.1 D2.2 | length 935.1
  Top Layer w30: v1(284.9,-83.9) D1.1 ; D2.2 v1(1116.9,-78.9)
  Bottom Layer w30: v1(284.9,-83.9) 300.8,-68 1106,-68 v1(1116.9,-78.9)
NetD1_2: D1.2 R1.2 | length 641.7
  Top Layer w20: R1.2 153.46,-558.46 v1(174,-579) ; v1(288,-156) 318.1,-156 319.1,-157 D1.2
  Bottom Layer w20: v1(174,-579) 87,-492 87,-397 288,-196 v1(288,-156)
NetLED1_B: LED1.B RN1.3 | length 256.4
  Top Layer w12: LED1.B 72.44,-470.44 93,-491 193,-491 244.75,-542.75 RN1.3
NetLED1_G: LED1.G RN1.2 | length 281.8
  Top Layer w12: LED1.G 72.44,-334.44 249.25,-511.25 RN1.2
NetLED1_R: LED1.R RN1.1 | length 226.6
  Top Layer w12: LED1.R 127.56,-356.56 250.76,-479.76 RN1.1
NetQ1_1: Q1.1 R2.2 RN1.4 | length 239.9
  Top Layer w15: Q1.1 78.63,-680.37 123,-636 210.73,-636 RN1.4
NetQ1_3: Q1.3 R1.1 | length 74.1
  Top Layer w20: R1.1 86.54,-570.23 Q1.3
NRST: C1.1 JP2.1 JP3.4 RN3.4 U1.14 | length 1497.5
  Top Layer w12: C1.1 370.5,-1028.5 386.31,-1012.69 U1.14 475.37,-1012.69 478.06,-1010 576,-1010 640,-1074 v1(680,-1074) ; JP3.4 1224,-1290 1279,-1235 1279,-1046 JP2.1@1335,-990
  Bottom Layer w12: RN3.4 619.24,-1134.76 v1(680,-1074) 726,-1028 889.46,-1028 944.46,-1083 997,-1083 1104,-1190 1104,-1209 JP3.4
SD_CD: 1.9 RN2.5 U1.81 | length 755.9
  Top Layer w6: v1(859,-1239) 820,-1239 762,-1181 762,-857 875.8,-743.2 U1.81
  Bottom Layer w16: RN2.5 858.87,-1211.14 1.9
SDIO_CLK: 1.5 U1.80 | length 719.8
  Top Layer w6: v1(714,-1189) v1(714,-1129) ; v1(783,-1094) 783,-853 895.48,-740.52 U1.80
  Bottom Layer w6: v1(714,-1129) 714,-1118.94 738.94,-1094 v1(783,-1094)
  Bottom Layer w12: 1.5 686,-1295.83 686,-1217 v1(714,-1189)
SDIO_CMD: 1.3 RN2.8 U1.83 | length 793.7
  Top Layer w6: v1(759,-1209) 750,-1200 750,-852 836.43,-765.57 U1.83
  Top Layer w16: v1(619.79,-1248) 750,-1248 v1(756,-1242)
  Bottom Layer w16: 1.3 599.03,-1268.76 v1(619.79,-1248) ; v1(756,-1242) 756,-1204.27 RN2.8
SDIO_D0: 1.7 RN2.7 U1.65 | length 624.4
  Top Layer w7: v1@882,-1193 875.5,-1186.5 875.5,-964.5 896.5,-943.5 1012.57,-943.5 1022.7,-953.63 U1.65
  Bottom Layer w7: RN2.7 788.25,-1198.94 812.19,-1175 870,-1175 v1(883,-1188)
  Bottom Layer w16: 1.7 787.79,-1280.65 787.79,-1203.97 RN2.7
SDIO_D1: 1.8 RN2.6 U1.66 | length 545.6
  Top Layer w7: v1(820,-1198) 820,-1184 860.5,-1143.5 860.5,-1050.09 860,-1049.59 860,-959 888.5,-930.5 1038.5,-930.5 U1.66
  Bottom Layer w12: 1.8 1.8@819.75,-1292
  Bottom Layer w16: 1.8@819.75,-1292 RN2.6
SDIO_D2: 1.1 RN3.8 U1.78 | length 900.2
  Top Layer w6: v1(839,-1059) 839,-832 934.85,-736.15 U1.78
  Bottom Layer w6: RN3.8 524.76,-1188.36 545.12,-1168 631,-1168 661,-1138 661,-1127 733,-1055 835,-1055 v1(839,-1059)
  Bottom Layer w12: 1.1 512.42,-1239.58 524.76,-1227.24 RN3.8
SDIO_D3: 1.2 RN3.7 U1.79 | length 861.8
  Top Layer w6: v1@812,-1085 812,-842 915.17,-738.83 U1.79
  Bottom Layer w6: RN3.7 556.25,-1185.75 562,-1180 635.97,-1180 673,-1142.97 673,-1131.97 735.97,-1069 804,-1069 v1(811,-1076)
  Bottom Layer w12: 1.2 556.25,-1295.66 RN3.7
SPI2_MISO: JP1.2 U1.53 | length 1461.6
  Top Layer w12: v1(934,-1160) 983.54,-1160 1013.54,-1190 1041.79,-1190 U1.53
  Bottom Layer w12: JP1.2 134,-1159 134,-1246 299,-1411 830.6,-1411 833.6,-1414 868.4,-1414 871.4,-1411 931.09,-1411 972,-1370.09 972,-1275.4 928,-1231.4 928,-1166 v1(934,-1160)
SPI2_MOSI: JP1.1 U1.54 | length 1557.3
  Top Layer w12: v1(897,-1149) 910,-1136 984.99,-1136 1019.16,-1170.17 U1.54
  Bottom Layer w12: JP1.1 128,-1053 128,-1117.63 152,-1141.63 152,-1234 311,-1393 838.06,-1393 841.06,-1396 860.94,-1396 863.94,-1393 911,-1393 954,-1350 954,-1282.85 910,-1238.85 910,-1162 v1(897,-1149)
SPI2_NSS: JP1.4 U1.51 | length 1302
  Top Layer w12: v1(970,-1214) 985,-1229 1041.72,-1229 U1.51
  Bottom Layer w12: JP1.4 116.54,-1290 276.54,-1450 943,-1450 1009,-1384 1009,-1253 v1(970,-1214)
SPI2_SCLK: JP1.3 U1.52 | length 1375.5
  Top Layer w12: v1(953,-1184) 980,-1184 1005.54,-1209.54 U1.52
  Bottom Layer w12: JP1.3 65,-1213 284,-1432 935.54,-1432 990,-1377.54 990,-1267.94 946,-1223.94 946,-1191 v1(953,-1184)
SPI3_MISO: U1.90
SPI3_MOSI: U1.91
SPI3_SCLK/TRACESWO: JP3.1 U1.89 | length 763.1
  Top Layer w12: U1.89 718.31,-949.69 v1(721,-947)
  Bottom Layer w12: v1(721,-947) 721,-973 740,-992 1183,-992 JP3.1
SPI3_SSEL: U1.77
SWCLK: JP3.2 U1.76 | length 563.4
  Top Layer w12: U1.76 985.16,-700 v1(1030,-700) ; JP3.2 1243,-1032 1243,-947 v1(1189,-893)
  Bottom Layer w12: v1(1030,-700) 1030,-732 1029,-733 v1(1189,-893)
SWDIO: JP3.3 U1.72 | length 576
  Top Layer w12: U1.72 1095.37,-815.83 1129.54,-850 1212,-850 1261,-899 1261,-1114 JP3.3
TIM4_CH1: JP2.6 U1.59 | length 807.7
  Top Layer w12: v1(900,-1073) 916,-1089 991.94,-1089 1008.94,-1072 1041.68,-1072 U1.59
  Bottom Layer w12: v1(900,-1073) 909,-1073 937,-1101 989.54,-1101 1086,-1197.46 1086,-1216.46 1132,-1262.46 1132,-1307 1167,-1342 1198.97,-1342 1335,-1478.03 JP2.6@1335,-1490
TIM4_CH2: JP2.5 U1.60 | length 574.5
  Top Layer w12: v1(983,-1057) 987.94,-1052.06 994.94,-1052.06 ; v1@994,-1053 994.94,-1052.06 ; U1.60 994.94,-1052.06
  Bottom Layer w12: v1(983,-1057) 998.54,-1057 1101.54,-1160 1102,-1160 1126,-1184 1126,-1202 1162,-1238 1203,-1238 1335,-1370 JP2.5@1335,-1390
TIM4_CH3: JP2.4 U1.61 | length 621.9
  Top Layer w12: v1(945,-1046) 958.63,-1032.37 U1.61
  Bottom Layer w12: v1(945,-1046) 958.63,-1032.37 999.37,-1032.37 1109,-1142 1216,-1142 1335,-1261 JP2.4@1335,-1290
UART2_RX: U1.87
UART2_TX: U1.86
VBUS: C2.A C3.1 JP2.7 U1.68 U5.3 X1.1 | length 1549.2
  Top Layer w12: X1.1 895.08,-1513.92 1024,-1385 1024.54,-1385 1061.54,-1348 1069.4,-1348 1099,-1318.4 1099,-916.85 1076.72,-894.57 U1.68
  Top Layer w16: X1.1 v1(895.08,-1626) 895.08,-1627.92 1065.93,-1627.92 1066.59,-1627.26 1107.42,-1627.26 1108.08,-1627.92 1297.08,-1627.92 JP2.7@1335,-1590
  Bottom Layer w16: v1(687,-1582) 731,-1626 v1(895.08,-1626)
VCAP1: C49.1 U1.48 | length 255.5
  Top Layer w6: C49.1 795.19,-1343.32 919.02,-1343.32 934.85,-1327.48 U1.48
VCAP2: C48.1 U1.73 | length 268.3
  Top Layer w12: U1.73 1101.15,-796.15 1137,-832 1215.5,-832 C48.1
VCC: 1.4 C6.1 C8.1 C9.1 C10.1 C11.A C13.1 C15.A C16.1 C17.1 C20.A C23.A C24.1 D2.1 JP1.8 JP3.5 L1.2 LED1.A R3.1 R4.1 R12.2 RN2.1 RN2.2 RN2.3 RN2.4 RN3.1 RN3.2 RN3.5 U1.6 U1.11 U1.27 U1.50 U1.75 U1.100 U5.2 x3.E5 | length 5175.7
  Top Layer w6: v1(648,-165.5) 641.68,-171.83 641.68,-255.84 x3.E5
  Top Layer w12: LED1.A 147.5,-464 v1(160,-464) ; C9.1 304,-669.5 304,-460 327,-437 418.5,-437 C13.1 ; L1.2 434.5,-1368 494,-1368 521.46,-1340.54 U1.27 521.46,-1274.15 505,-1257.69 505,-1086.37 523,-1068.37 v1(523,-1051) ; C10.1 367.13,-953.63 U1.11 468.37,-953.63 v1(476,-946) 476,-872.94 462,-858.94 462,-857.94 459.26,-855.2 U1.6 ; U1.100 501.78,-596.76 R3.1 ; v1(553,-1134) 553,-1137.27 617.73,-1202 v1(662,-1202) ; C6.1 920.46,-1399 974.22,-1345.24 ; U1.50 974.22,-1345.24 ; U1.75 1108.22,-756.78 1151.5,-713.5 C8.1 ; v1(1062,-1263) 1076,-1277 1076,-1315.94 1061.94,-1330 1051,-1330 1036,-1345 974.46,-1345 974.22,-1345.24
  Top Layer w30: C15.A 329,-1404.12 L1.2 ; JP3.5@1176,-1399 JP3.5
  Top Layer w40: C24.1 323.12,-1447.38 C15.A
  Top Layer w50: D2.1 1071,-140.1 v1(1071,-139) ; C11.A v1(1163.88,-547.12)
  Bottom Layer w12: v1(160,-464) 160,-509 v1(302,-651) ; v1(523,-568) 527,-572 527,-588.06 526,-589.06 526,-896 v1(476,-946) 524.76,-994.76 RN3.1 ; v1(553,-1134) 559.5,-1134 RN3.2@556.25,-1130.75 ; RN3.2 RN3.2@556.25,-1132 ; 1.4 646,-1292.52 646,-1236.06 616.35,-1206.4 620.75,-1202 v1(662,-1202) 711,-1153 730,-1153 751.27,-1131.73 751.27,-1137 RN2.1 ; v1(648,-165.5) 669.5,-144 826,-144 870,-188 v1(927,-188) ; RN2.4 872.73,-1121 984.09,-1121 1051,-1187.91 1051,-1252 v1(1062,-1263)
  Bottom Layer w20: v1(1071,-139) 1222,-290 1222,-436 1163.88,-494.12 v1(1163.88,-547.12)
  Bottom Layer w30: v1@1063.2,-1262.02 1085,-1283.82 1085,-1321.18 1153.82,-1390 JP3.5
  Bottom Layer w40: JP1.8 147,-1608 v1(201,-1608) 201,-1582 v1(198,-1579)
pads on no net: 1.0 1.11 1.12 LM1.P$1 LM1.P$2 M1.B2,8 M2.B2,8 U1.2 U1.7 U1.8 U1.9 U1.18 U1.22 U1.23 U1.24 U1.25 U1.31 U1.32 U1.33 U1.34 U1.35 U1.36 U1.37 U1.38 U1.39 U1.40 U1.41 U1.42 U1.43 U1.44 U1.45 U1.57 U1.58 U1.62 X1.0 X1.4 x3.A6 x3.E2
copper on no net:
  other v1: 131,-216 1271,-216 70.9,-191.1 191.1,-191.1 1210.9,-191.1 1331.1,-191.1 46,-131 216,-131 1186,-131 1356,-131 70.9,-70.9 191.1,-70.9 1210.9,-70.9 1331.1,-70.9 131,-46 1271,-46

## Polygon pours and split planes (outlines as drawn)
GND on Top Layer "NONET_L-01_P-001" (solid, remove dead copper, pour order 50): -13,-1742 -3,-1752 1410,-1752 1410,-3 1405,2 -10,2 -10,-1736 6,-1752
GND on Bottom Layer "NONET_L-01_P-001" (solid, remove dead copper, pour order 52): -6,-1741 -3,-1744 1399,-1744 1399,-15 1404,-10 1400,-6 -9,-6 -9,-1729 14,-1752

## Other copper
Top Layer:
  region net GND: 769,-64 453,-64 453,-124 769,-124
  region net VCC: 676,-144 555,-144 555,-209 676,-209
  region net VCC: 523,-152 454,-152 454,-250 523,-250
  region net VCC: 666,-152 454,-152 454,-202 666,-202
  region net VCC: 1103,-116 914,-116 914,-208 1103,-208
  region net GND: 1306,-581 1243,-581 1243,-736 1306,-736
  region net VCC: 1197,-583 1134,-583 1134,-738 1197,-738
  region net AVDD: 959,-226 849,-226 849,-291 959,-291
  region net VCC: 529,-155 444,-155 444,-504 529,-504
  region net VCC: 566,-469 504,-469 504,-577 566,-577
  region net GND: 248,-659 132,-659 132,-705 248,-705
  region net NetQ1_1: 99,-657 51,-657 51,-779 99,-779
  region net NetC41_2: 215,-862 165,-862 165,-968 215,-968
  region net GND: 280,-858 240,-858 240,-971 280,-971
  region net NetC40_2: 297,-1000 240,-1000 240,-1117 297,-1117
  region net GND: 221,-996 163,-996 163,-1116 221,-1116
  region net NetC4_1: 350,-1158 184,-1158 184,-1223 350,-1223
  region net GND: 293,-1239 189,-1239 189,-1302 293,-1302
  region net VCC: 365,-1543 175,-1543 175,-1629 365,-1629
  region net VCC: 365,-1543 270,-1543 270,-1680 365,-1680
  region net VBUS: 700,-1444 638,-1444 638,-1612 700,-1612
  region net VBUS: 699,-1497 543,-1497 543,-1544 699,-1544
  region net VCC: 619,-1586 286,-1586 286,-1634 619,-1634
  region net GND: 732,-1657 545,-1657 545,-1723 732,-1723
  region net VCC: 317,-1471 253,-1471 253,-1592 317,-1592
  region net GND: 234,-1376 183,-1376 183,-1515 234,-1515
  region net GND: 861,-1378 795,-1378 795,-1491 861,-1491
  region net GND: 862,-1446 719,-1446 719,-1495 862,-1495
  region net GND: 935,-487 875,-487 875,-592 935,-592
  region net GND: 1053,-1507 991,-1507 991,-1571 1053,-1571
  region net VCC: 964,-1384 877,-1384 877,-1414 964,-1414
  region net GND: 244,-1239 181,-1239 181,-1445 244,-1445
  pour cut-out: 803.5,-406.26 811,-398.76 811,-212 593.5,-212 592.5,-211 585.5,-218 585.5,-420 809.76,-420 811.5,-421.74
Bottom Layer:
  region net GND: 360,-1068 161,-1068 161,-1128 360,-1128
  region net VCC: 865,-1117 739,-1117 739,-1156 865,-1156
  region net VCC: 566,-1117 512,-1117 512,-1155 566,-1155
  region net GND: 1053,-1507 841,-1507 841,-1571 1053,-1571

## Silkscreen, mask and mechanical layers (free items; w line width, h text height)
Top Overlay:
  text "P0" at 149,-1008 h47.24 r90
  text "RST" at 1275,-1020 h47.24 r90
  text "SWO" at 1120,-1025 h47.24 r90
  text "P1" at 154,-1109 h47.24 r90
  text "SWC" at 1120,-1125 h47.24 r90
  text "BOOT" at 1275,-1137.5 h47.24 r90
  text "P2" at 154,-1210 h47.24 r90
  text "SWD" at 1120,-1225 h47.24 r90
  text "SYN" at 1275,-1235 h47.24 r90
  text "P9" at 1275,-1310 h47.24 r90
  text "P3" at 154,-1311 h47.24 r90
  text "RST" at 1120,-1320 h47.24 r90
  text "P8" at 1275,-1410 h47.24 r90
  text "P4" at 154,-1412 h47.24 r90
  text "3.3v" at 1120,-1430 h47.24 r90
  text "P7" at 1275,-1505 h47.24 r90
  text "P5" at 154,-1513 h47.24 r90
  text "GND" at 1120,-1525 h47.24 r90
  text "P6" at 154,-1614 h47.24 r90
  text "VIN" at 1275,-1620 h47.24 r90
  text "GND" at 1275,-1720 h47.24 r90
  text "3.3V" at 154,-1730 h47.24 r90
Bottom Overlay:
  lines w5: 424.41,-524 424.41,-54.41 975.59,-54.41 975.59,-524 424.41,-524
  lines w10: 123,-703 323,-703 323,-653 ; 123,-453 323,-453 ; 515,-1014 895,-1014 ; 515,-544 795,-544 ; 845,-544 895,-544
  text "STM32H743" at 876,-209 h70
  text "OV7725" at 876,-294 h70
  text "OPENMV4" at 876,-379 h70
  text "LED1=Red" at 298,-513 h27.2
  text "LED2=Green" at 293,-568 h27.2
  text "P0=PB15/MOSI" at 895,-594 h27.2
  text "LED3=Blue" at 293,-618 h27.2
  text "P1=PB14/MISO" at 895,-639 h27.2
  text "LED4=IR" at 293,-673 h27.2
  text "P2=PB13/SCLK" at 895,-684 h27.2
  text "P3=PB12/SS" at 895,-729 h27.2
  text "P4=PB10/TXD/SCL" at 895,-774 h27.2
  text "P5=PB11/RXD/SDA" at 895,-819 h27.2
  text "P6=PA5/ADC/DAC" at 895,-864 h27.2
  text "P7=PD12/SERVO1" at 895,-909 h27.2
  text "P8=PD13/SERVO2" at 895,-954 h27.2
  text "P9=PD14/SERVO3" at 895,-999 h27.2
  text "P0" at 125,-1005 h27.2 r270
  text "RST" at 1245,-1025 h27.2 r270
  text "SWO" at 1085,-1030 h27.2 r270
  text "P1" at 125,-1105 h27.2 r270
  text "SWC" at 1085,-1130 h27.2 r270
  text "BOOT" at 1245,-1142.5 h25.5 r270
  text "P2" at 125,-1205 h27.2 r270
  text "SWD" at 1080,-1230 h27.2 r270
  text "SYN" at 1245,-1240 h27.2 r270
  text "P3" at 125,-1310 h27.2 r270
  text "P9" at 1245,-1315 h27.2 r270
  text "RST" at 1080,-1325 h27.2 r270
  text "P4" at 125,-1410 h27.2 r270
  text "P8" at 1245,-1415 h27.2 r270
  text "3.3v" at 1080,-1435 h27.2 r270
  text "P5" at 125,-1510 h27.2 r270
  text "P7" at 1245,-1510 h27.2 r270
  text "GND" at 1031,-1531 h27.2 r270
  text "P6" at 125,-1605 h27.2 r270
  text "VIN" at 1245,-1625 h27.2 r270
  text "3.3V" at 125,-1725 h27.2 r270
  text "GND" at 1245,-1725 h27.2 r270
Mechanical 1:
  the board outline again, w6
Drill Drawing:
  lines w20: -14,-10 -5,-1 ; -5,-1 1408,-1 1410,-3 1410,-1747 1407,-1750 -14,-1750 -14,-2 -13,-1 -5,-1